# Altium PCB bootleg-2.PcbDoc (part 1 of 2)
Units mm, origin at the board's own origin, x right, y up, seen from the top; angles counter-clockwise.
Board outline 284.8 x 94.3 mm, 2 copper layers (Component Side, Bottom Layer), stack 1.571 mm thick; 153 components, 101 nets, 573 pads, 48 vias.
Unrouted connection lines stored in the file: 2.
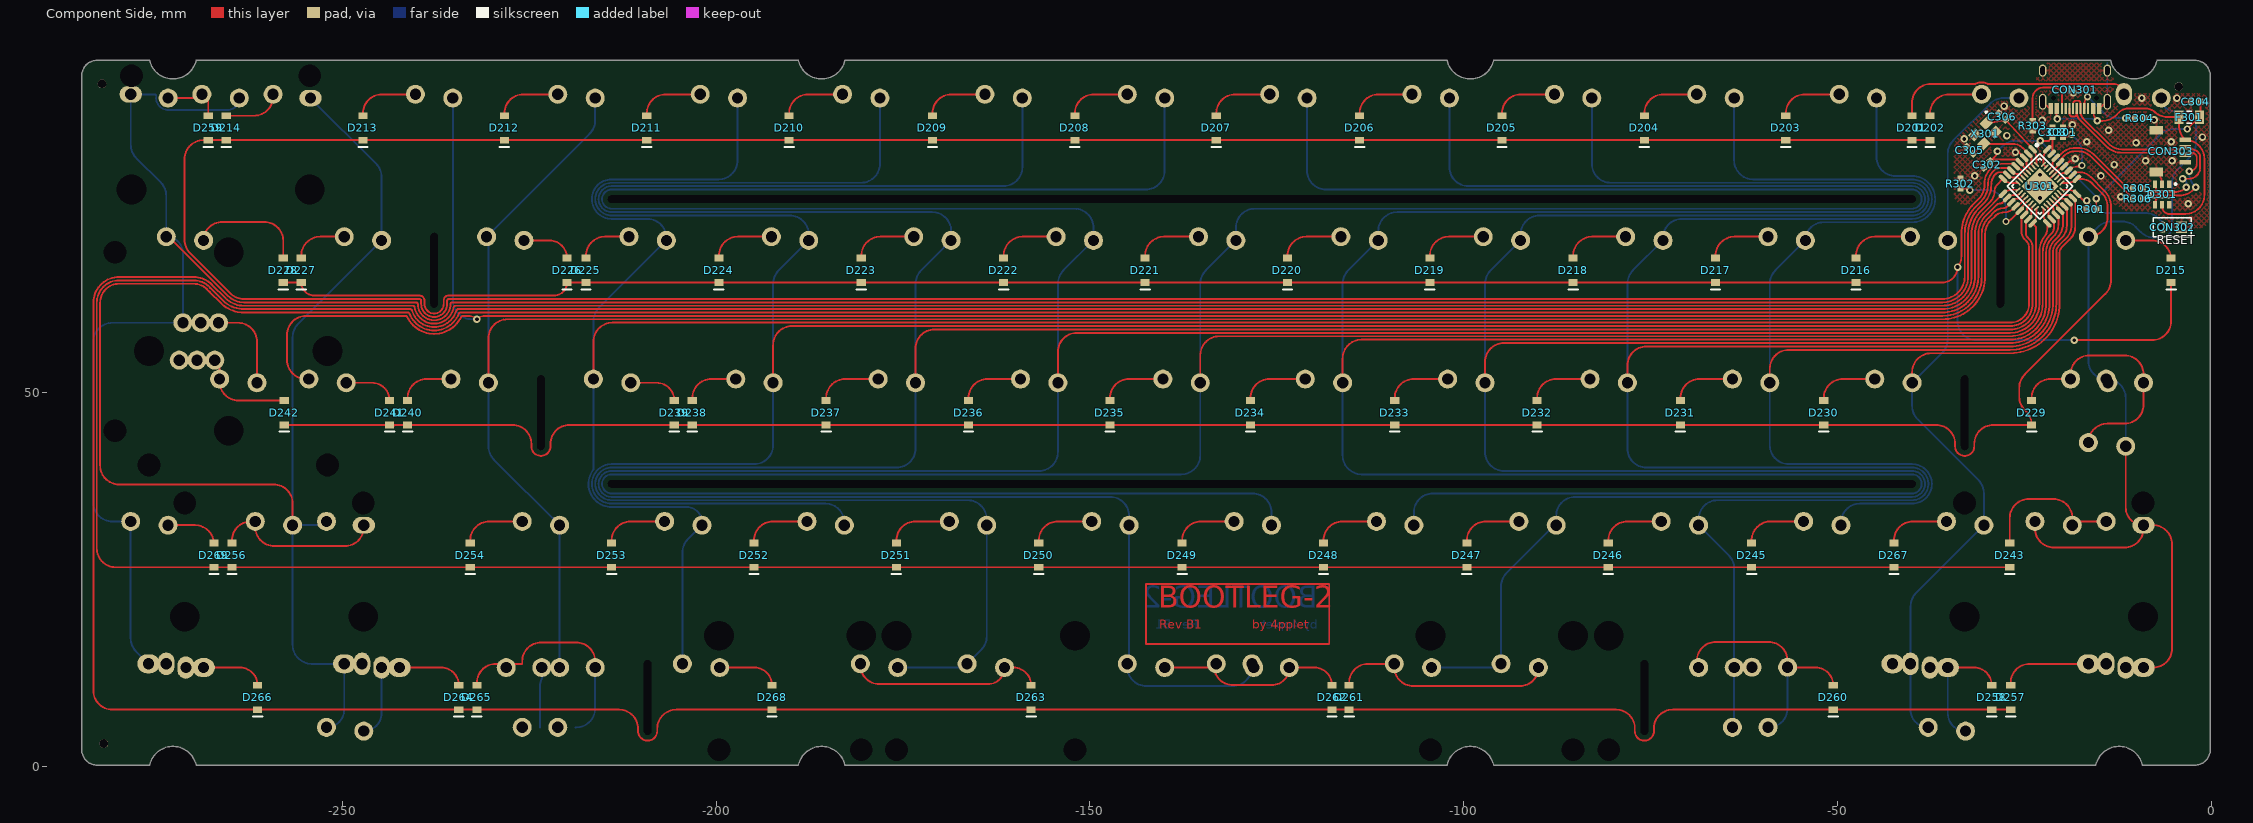
[diagram p0: Component Side view]
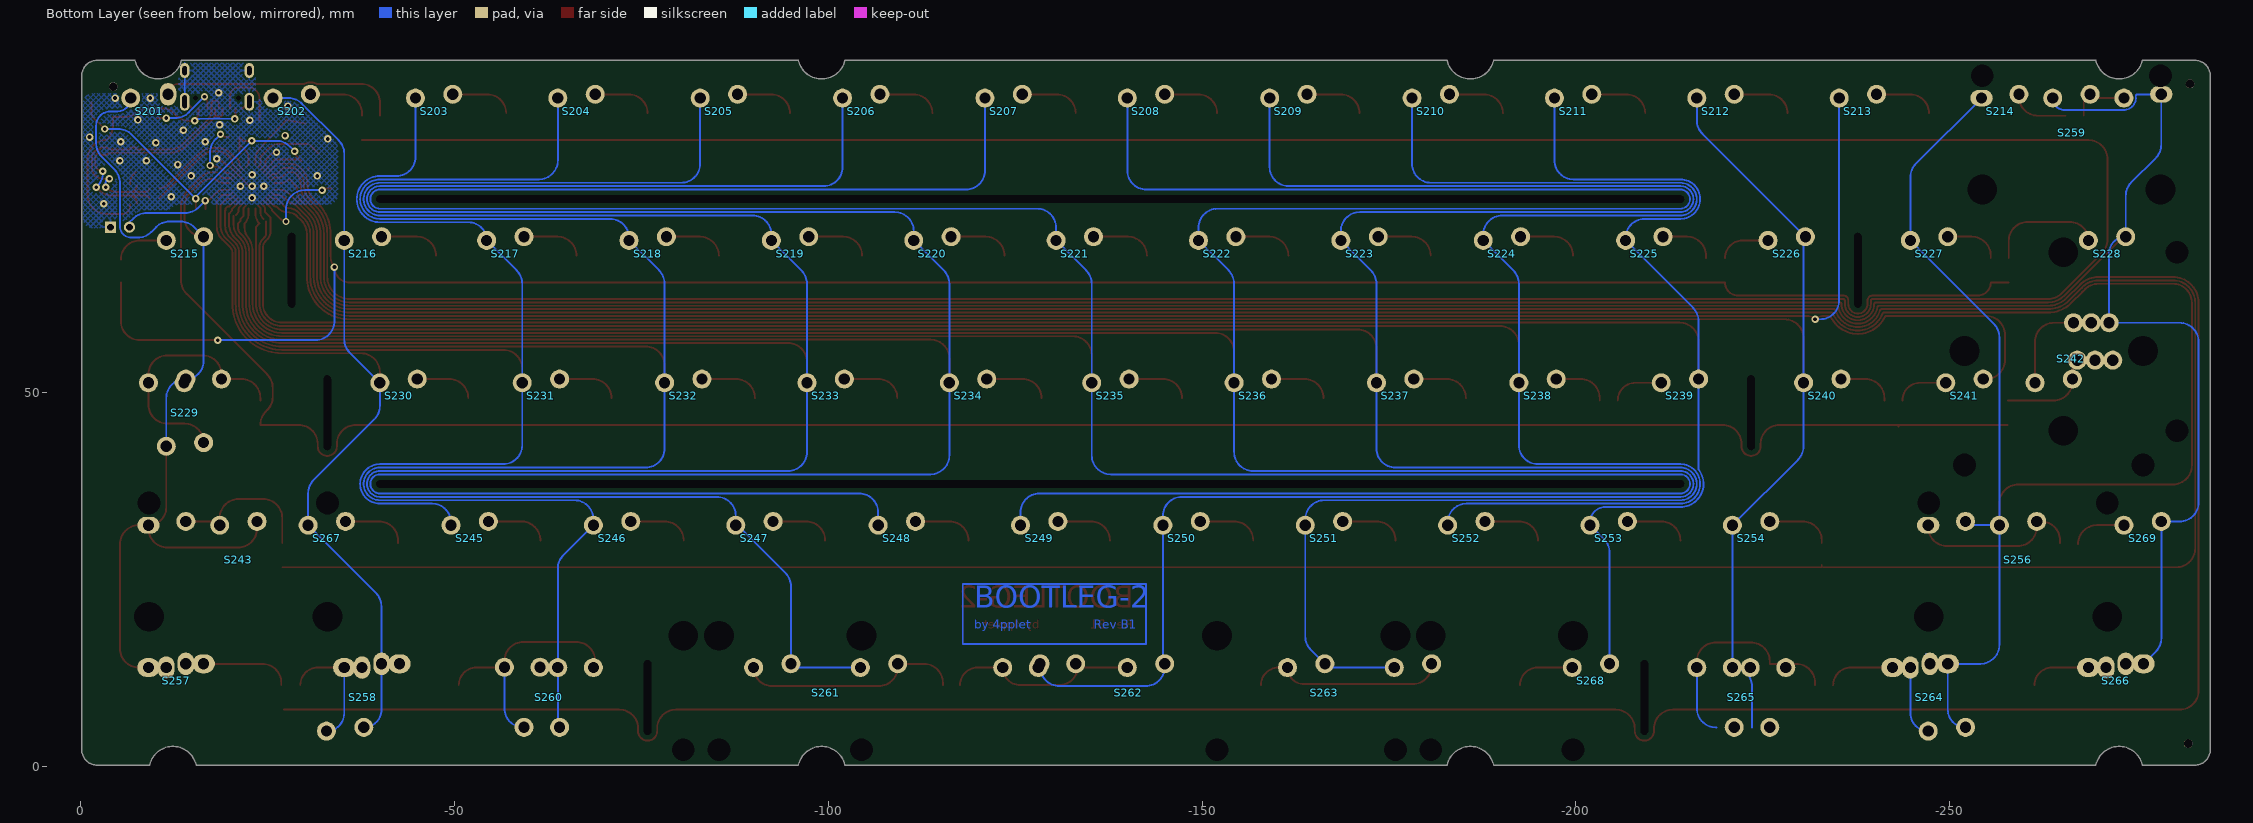
[diagram p1: Bottom Layer view, seen from below]

## Layer stack, top to bottom
Top Solder: solder mask 0.0102, Solder Resist, Dk 3.5
Component Side: signal copper 0.0356
Dielectric 1: core 1.5, FR-4, Dk 4.2
Bottom Layer: signal copper 0.0356
Solder Side: solder mask 0.0102, Solder Resist, Dk 3.5

## Board outline
-282.856,0.165 -275.856,0.165 ccw(c-275.856,0.215) -275.807,0.204 cw(c-272.706,-0.52) -269.605,0.204 ccw(c-269.556,0.215) -269.556,0.165 -189.056,0.165 ccw(c-189.056,0.215) -189.007,0.204 cw(c-185.906,-0.52) -182.805,0.204 cw(c-185.906,-0.52) -182.805,0.204 ccw(c-182.756,0.215) -182.756,0.165 -102.256,0.165 ccw(c-102.256,0.215) -102.207,0.204 cw(c-99.106,-0.52) -96.005,0.204 cw(c-99.106,-0.52) -96.005,0.204 ccw(c-95.956,0.215) -95.956,0.165 -15.456,0.165 ccw(c-15.456,0.215) -15.407,0.204 cw(c-12.306,-0.52) -9.205,0.204 ccw(c-9.156,0.215) -9.156,0.165 ccw(c-9.156,0.215) -9.156,0.165 -2.156,0.165 ccw(c-2.156,2.215) -0.106,2.215 -0.106,92.415 ccw(c-2.156,92.415) -2.156,94.465 -7.156,94.465 ccw(c-7.156,94.415) -7.17,94.464 ccw(c-7.183,94.415) -7.232,94.426 cw(c-10.333,95.149) -13.434,94.426 ccw(c-13.483,94.415) -13.483,94.465 -95.956,94.465 cw(c-95.956,94.415) -95.956,94.465 ccw(c-95.956,94.415) -96.005,94.426 cw(c-99.106,95.149) -102.207,94.426 cw(c-99.106,95.149) -102.207,94.426 ccw(c-102.256,94.415) -102.256,94.465 -182.756,94.465 ccw(c-182.756,94.415) -182.805,94.426 ccw(c-185.906,95.149) -182.805,94.426 cw(c-185.906,95.149) -189.007,94.426 ccw(c-189.056,94.415) -189.056,94.465 -269.556,94.465 ccw(c-269.556,94.415) -269.605,94.426 cw(c-272.706,95.149) -275.807,94.426 cw(c-272.706,95.149) -275.807,94.426 ccw(c-275.856,94.415) -275.856,94.465 -282.856,94.465 cw(c-282.856,94.415) -282.856,94.465 ccw(c-282.856,92.415) -284.906,92.415 ccw(c-284.856,92.415) -284.906,92.414 -284.906,36.565 -284.906,2.215 ccw(c-282.856,2.215)

## Design rules (kind name [scope] priority, off if disabled: settings)
Clearance [All] p1: gap=0.2 ignorepadtopadclearanceinfootprint=FALSE except(0: Arc-Hole Track-Hole SMDPad-Hole THPad-Hole Via-Hole Fill-Hole Poly-Hole Region-Hole Text-Hole; 0.254: THPad-THPad THPad-Via THPad-Fill THPad-Poly THPad-Region THPad-Text Via-Via Via-Fill Via-Poly Via-Region Via-Text Fill-Fill Fill-Poly Fill-Region Fill-Text Poly-Poly Poly-Region Poly-Text Region-Region Region-Text Text-Text)
ComponentClearance [InComponent('No Component') And OnLayer('Component Side')] p1: gap=0.254 collisioncheckmode=3 verticalgap=0.254 showdistances=FALSE
DiffPairsRouting DiffPairsRouting_USB [InDifferentialPairClass('All Differential Pairs')] p1: maxlimit=0.254 minlimit=0.203 mostfreqgap=0.203 toplayer_minwidth=0.152 toplayer_maxwidth=0.381 toplayer_prefwidth=0.152 bottomlayer_minwidth=0.152 bottomlayer_maxwidth=0.381 bottomlayer_prefwidth=0.152 maxuncoupledlength=12.7
DiffPairsRouting [All] p2: maxlimit=0.254 minlimit=0.254 mostfreqgap=0.254 toplayer_minwidth=0.381 toplayer_maxwidth=0.381 toplayer_prefwidth=0.381 bottomlayer_minwidth=0.381 bottomlayer_maxwidth=0.381 bottomlayer_prefwidth=0.381 maxuncoupledlength=12.7
HoleSize [All] p1: absolutevalues=TRUE maxlimit=20 minlimit=0.025 maxpercent=80.000 minpercent=20.000
MatchedLengths MatchedLengths_USB_DiffPairs_1 [All] p1: tolerance=0.127 checknetsindiffpair=TRUE checkdiffpairvsdiffpair=FALSE checkxsignals=FALSE checkothers=FALSE
MatchedLengths MatchedLengths_USB_DiffPairs [All] p2: tolerance=0.127 checknetsindiffpair=TRUE checkdiffpairvsdiffpair=FALSE checkxsignals=FALSE checkothers=FALSE
PolygonConnect PolygonConnect_1 [All vs IsVia] p1: connectstyle=Direct reliefconductorwidth=0.254 reliefentries=4 polygonreliefangle="90 Angle" airgapwidth=0.254
PolygonConnect [All] p2: connectstyle=Relief reliefconductorwidth=0.254 reliefentries=4 polygonreliefangle="90 Angle" airgapwidth=0.254
RoutingVias [All] p1: holewidth=0.711 width=1.27 viastyle="Through Hole" minholewidth=0.711 minwidth=1.27 maxholewidth=0.711 maxwidth=1.27
SolderMaskExpansion [All] p1: expansion=0.102 istentingtop=FALSE
Width [All] p1: maxlimit=0.254 minlimit=0.203 preferedwidth=0.254
27 further rules are at their usual default settings.

## Classes and differential pairs
component class Designator: C201 C202 C203 C204 C205 C206 D201 D202 D203 D204 D205 D206 D207 D208 D209 D210 D211 D212 D213 D214 D215 D216 D217 D218 D219 D220 D221 D222 D223 D224 D225 D226 D227 D228 D229 D230 D231 D232 D233 D234 D235 D236 D237 D238 D239 D240 D241 D242 D243 D245 D246 D247 D248 D249 D250 D251 D252 D253 D254 D256 D257 D258 D259 D260 D261 D262 D263 D264 D265 D266 D267 D268 D269 S201 S202 S203 S204 S205 S206 S207 S208 S209 S210 S211 S212 S213 S214 S215 S216 S217 S218 S219 S220 S221 S222 S223 S224 S225 S226 S227 S228 S229 S230 S231 S232 S233 S234 S235 S236 S237 S238 S239 S240 S241 S242 S243 S245 S246 S247 S248 S249 S250 S251 S252 S253 S254 S256 S257 S258 S259 S260 S261 S262 S263 S264 S265 S266 S267 S268 S269
differential pair D: +D_P -D_N
differential pair D_PRE: +D_PRE_P -D_PRE_N

## Components (designator, comment, footprint, x,y, rotation, side; value= is the part's Value field where it differs from the comment)
C301 "" C0603[1608] -19.818,84.836 r270 top value=1uF
C302 "" C0603[1608] -29.978,80.518 r45 top value=0.1uF
C303 "" C0603[1608] -21.215,84.836 r270 top value=0.1uF
C304 "" C0603[1608] -2.038,88.9 r0 top value=4,7uF
C305 "" C0603[1608] -32.264,82.423 r315 top value=15pF
C306 "" C0603[1608] -27.951,86.939 r315 top value=15pF
CON301 "TYPE-C-31-M-12" TYPE-C-31-M-12 -18.206,88 r180 top
CON302 "Header 2" HDR1X2 -3.943,72.136 r180 top
CON303 "Header 5" "JST SM04B-SRSS-TB" -7.31,85.104 r270 top
D201 "Diode" SOD-123 -40.016,85.415 r90 top
D202 "Diode" SOD-123 -37.598,85.415 r90 top
D203 "Diode" SOD-123 -56.902,85.415 r90 top
D204 "Diode" SOD-123 -75.825,85.415 r90 top
D205 "Diode" SOD-123 -94.875,85.415 r90 top
D206 "Diode" SOD-123 -113.925,85.415 r90 top
D207 "Diode" SOD-123 -133.102,85.415 r90 top
D208 "Diode" SOD-123 -152.025,85.415 r90 top
D209 "Diode" SOD-123 -171.075,85.415 r90 top
D210 "Diode" SOD-123 -190.252,85.415 r90 top
D211 "Diode" SOD-123 -209.302,85.415 r90 top
D212 "Diode" SOD-123 -228.352,85.415 r90 top
D213 "Diode" SOD-123 -247.275,85.415 r90 top
D214 "Diode" SOD-123 -265.563,85.415 r90 top
D215 "Diode" SOD-123 -5.34,66.365 r90 top
D216 "Diode" SOD-123 -47.504,66.365 r90 top
D217 "Diode" SOD-123 -66.3,66.365 r90 top
D218 "Diode" SOD-123 -85.35,66.365 r90 top
D219 "Diode" SOD-123 -104.527,66.365 r90 top
D220 "Diode" SOD-123 -123.577,66.365 r90 top
D221 "Diode" SOD-123 -142.627,66.365 r90 top
D222 "Diode" SOD-123 -161.55,66.365 r90 top
D223 "Diode" SOD-123 -180.6,66.365 r90 top
D224 "Diode" SOD-123 -199.65,66.365 r90 top
D225 "Diode" SOD-123 -217.435,66.365 r90 top
D226 "Diode" SOD-123 -219.975,66.365 r90 top
D227 "Diode" SOD-123 -255.535,66.365 r90 top
D228 "Diode" SOD-123 -257.943,66.365 r90 top
D229 "Diode" SOD-123 -24.009,47.315 r90 top
D230 "Diode" SOD-123 -51.822,47.315 r90 top
D231 "Diode" SOD-123 -70.999,47.315 r90 top
D232 "Diode" SOD-123 -90.176,47.315 r90 top
D233 "Diode" SOD-123 -109.226,47.315 r90 top
D234 "Diode" SOD-123 -128.53,47.315 r90 top
D235 "Diode" SOD-123 -147.326,47.315 r90 top
D236 "Diode" SOD-123 -166.249,47.315 r90 top
D237 "Diode" SOD-123 -185.299,47.315 r90 top
D238 "Diode" SOD-123 -203.211,47.315 r90 top
D239 "Diode" SOD-123 -205.624,47.315 r90 top
D240 "Diode" SOD-123 -241.3,47.315 r90 top
D241 "Diode" SOD-123 -243.713,47.315 r90 top
D242 "Diode" SOD-123 -257.81,47.315 r90 top
D243 "Diode" SOD-123 -26.935,28.265 r90 top
D245 "Diode" SOD-123 -61.474,28.265 r90 top
D246 "Diode" SOD-123 -80.651,28.265 r90 top
D247 "Diode" SOD-123 -99.574,28.265 r90 top
D248 "Diode" SOD-123 -118.751,28.265 r90 top
D249 "Diode" SOD-123 -137.674,28.265 r90 top
D250 "Diode" SOD-123 -156.851,28.265 r90 top
D251 "Diode" SOD-123 -175.901,28.265 r90 top
D252 "Diode" SOD-123 -194.951,28.265 r90 top
D253 "Diode" SOD-123 -214.001,28.265 r90 top
D254 "Diode" SOD-123 -232.924,28.265 r90 top
D256 "Diode" SOD-123 -264.806,28.265 r90 top
D257 "Diode" SOD-123 -26.808,9.215 r90 top
D258 "Diode" SOD-123 -29.348,9.215 r90 top
D259 "Diode" SOD-123 -267.981,85.415 r90 top
D260 "Diode" SOD-123 -50.552,9.215 r90 top
D261 "Diode" SOD-123 -115.327,9.215 r90 top
D262 "Diode" SOD-123 -117.613,9.215 r90 top
D263 "Diode" SOD-123 -157.872,9.215 r90 top
D264 "Diode" SOD-123 -234.453,9.215 r90 top
D265 "Diode" SOD-123 -232.035,9.215 r90 top
D266 "Diode" SOD-123 -261.372,9.215 r90 top
D267 "Diode" SOD-123 -42.429,28.265 r90 top
D268 "Diode" SOD-123 -192.543,9.215 r90 top
D269 "Diode" SOD-123 -267.214,28.265 r90 top
D301 "SRV05" SOT-23-6 -6.544,76.524 r270 top
F301 "Fuse Thermal" C1206[3216] -2.927,86.868 r180 top
R301 "Res1" R0603[1608] -16.008,74.549 r180 top value=10K
R302 "Res1" R0603[1608] -33.534,77.978 r90 top value=10K
R303 "Res1" R0603[1608] -23.876,85.725 r270 top value=5k1
R304 "Res1" R0603[1608] -9.525,86.741 r0 top value=5k1
R305 "Res1" R0603[1608] -9.785,77.343 r0 top value=22
R306 "Res1" R0603[1608] -9.785,75.946 r0 top value=22
S201 "MX" "Alps-switch - switched pol"#1 -9.156,85.415 r180 bottom locked
S202 "MX" "Alps-switch - switched pol"#2 -28.206,85.415 r180 bottom locked
S203 "MX" "Alps-switch - switched pol"#2 -47.256,85.415 r180 bottom locked
S204 "MX" "Alps-switch - switched pol"#2 -66.306,85.415 r180 bottom locked
S205 "MX" "Alps-switch - switched pol"#2 -85.356,85.415 r180 bottom locked
S206 "MX" "Alps-switch - switched pol"#2 -104.406,85.415 r180 bottom locked
S207 "MX" "Alps-switch - switched pol"#2 -123.456,85.415 r180 bottom locked
S208 "MX" "Alps-switch - switched pol"#2 -142.506,85.415 r180 bottom locked
S209 "MX" "Alps-switch - switched pol"#2 -161.556,85.415 r180 bottom locked
S210 "MX" "Alps-switch - switched pol"#2 -180.606,85.415 r180 bottom locked
S211 "MX" "Alps-switch - switched pol"#2 -199.656,85.415 r180 bottom locked
S212 "MX" "Alps-switch - switched pol"#2 -218.706,85.415 r180 bottom locked
S213 "MX" "Alps-switch - switched pol"#2 -237.756,85.415 r180 bottom locked
S214 "MX" "Alps-switch - switched pol"#3 -256.806,85.415 r180 bottom locked
S215 "MX" "ALPS-switch - 1.5U" -13.918,66.365 r180 bottom locked
S216 "MX" "Alps-switch - switched pol"#2 -37.731,66.365 r180 bottom locked
S217 "MX" "Alps-switch - switched pol"#2 -56.781,66.365 r180 bottom locked
S218 "MX" "Alps-switch - switched pol"#2 -75.831,66.365 r180 bottom locked
S219 "MX" "Alps-switch - switched pol"#2 -94.881,66.365 r180 bottom locked
S220 "MX" "Alps-switch - switched pol"#2 -113.931,66.365 r180 bottom locked
S221 "MX" "Alps-switch - switched pol"#2 -132.981,66.365 r180 bottom locked
S222 "MX" "Alps-switch - switched pol"#2 -152.031,66.365 r180 bottom locked
S223 "MX" "Alps-switch - switched pol"#2 -171.081,66.365 r180 bottom locked
S224 "MX" "Alps-switch - switched pol"#2 -190.131,66.365 r180 bottom locked
S225 "MX" "Alps-switch - switched pol"#2 -209.181,66.365 r180 bottom
S226 "MX" Alps-switch -228.231,66.365 r180 bottom locked
S227 "MX" "Alps-switch - switched pol"#2 -247.281,66.365 r180 bottom locked
S228 "MX" "ALPS-switch - 1.5U" -271.093,66.365 r180 bottom
S229 "MX" "ALPS-switch - CAPS" -16.3,47.315 r180 bottom
S230 "MX" "Alps-switch - switched pol"#2 -42.493,47.315 r180 bottom locked
S231 "MX" "Alps-switch - switched pol"#2 -61.543,47.315 r180 bottom locked
S232 "MX" "Alps-switch - switched pol"#2 -80.593,47.315 r180 bottom locked
S233 "MX" "Alps-switch - switched pol"#2 -99.643,47.315 r180 bottom locked
S234 "MX" "Alps-switch - switched pol"#2 -118.693,47.315 r180 bottom locked
S235 "MX" "Alps-switch - switched pol"#2 -137.743,47.315 r180 bottom locked
S236 "MX" "Alps-switch - switched pol"#2 -156.793,47.315 r180 bottom locked
S237 "MX" "Alps-switch - switched pol"#2 -175.843,47.315 r180 bottom locked
S238 "MX" "Alps-switch - switched pol"#2 -194.893,47.315 r180 bottom locked
S239 "MX" Alps-switch -213.943,47.315 r180 bottom locked
S240 "MX" "Alps-switch - switched pol"#2 -232.993,47.315 r180 bottom locked
S241 "MX" Alps-switch -252.018,47.315 r180 bottom locked
S242 "MX" "ALPS-switch - Enter" -263.956,47.315 r180 bottom locked
S243 "MX" "ALPS-switch - Left shift v2" -21.062,28.265 r180 bottom locked
S245 "MX" "Alps-switch - switched pol"#2 -52.018,28.265 r180 bottom locked
S246 "MX" "Alps-switch - switched pol"#2 -71.068,28.265 r180 bottom locked
S247 "MX" "Alps-switch - switched pol"#2 -90.118,28.265 r180 bottom locked
S248 "MX" "Alps-switch - switched pol"#2 -109.168,28.265 r180 bottom locked
S249 "MX" "Alps-switch - switched pol"#2 -128.218,28.265 r180 bottom locked
S250 "MX" "Alps-switch - switched pol"#2 -147.268,28.265 r180 bottom locked
S251 "MX" "Alps-switch - switched pol"#2 -166.318,28.265 r180 bottom locked
S252 "MX" "Alps-switch - switched pol"#2 -185.368,28.265 r180 bottom locked
S253 "MX" "Alps-switch - switched pol"#2 -204.418,28.265 r180 bottom locked
S254 "MX" "Alps-switch - switched pol"#2 -223.468,28.265 r180 bottom locked
S256 "MX" "ALPS-switch - right shift - stabs" -249.66,28.265 r180 bottom locked
S257 "MX" "ALPS-switch - 1.5u MOD-L" -13.918,9.215 r180 bottom locked
S258 "MX" "ALPS-switch - L_WIN - V2" -37.73,9.215 r180 bottom
S259 "MX" "ALPS-switch - backspace" -266.325,85.415 r180 bottom locked
S260 "MX" "ALPS-SWITCH - L_ALT - V2" -61.543,9.215 r180 bottom
S261 "MX" "ALPS-SWITCH - L SPLIT SPACE_V2" -102.024,9.215 r0 bottom locked
S262 "MX" "ALPS-SWITCH - SPACE_V3" -142.505,9.215 r180 bottom locked
S263 "MX" "ALPS-SWITCH - R SPLIT SPACE_V2" -163.937,9.215 r0 bottom locked
S264 "MX" "ALPS-switch - R_WIN V2" -247.28,9.215 r180 bottom
S265 "MX" "ALPS-SWITCH - R_ALT - V2" -223.468,9.215 r180 bottom
S266 "MX" "ALPS-switch - 1.5u MOD-R" -271.093,9.215 r180 bottom locked
S267 "MX" "Alps-switch - switched pol"#2 -32.899,28.265 r180 bottom
S268 "MX" "Alps-switch - switched pol"#2 -202.037,9.215 r180 bottom
S269 "MX" Alps-switch -275.856,28.265 r180 bottom locked
U301 "ATMEGA32U2" ATMEGA32U2-COMBO -22.892,77.6 r315 top
X301 "XTAL" XTAL-3225 -30.237,84.653 r225 top

## Footprints (in the part's own frame and the unit in brackets; to place one, negate y for a bottom-side part, rotate by r counter-clockwise, add the part's x,y. Pads: shape width x height; smd on the part's side, far side on the other; paste and mask are expansions set on the pad)
Alps-switch [mm]
  round 2.54 hole 1.499 mask+0.102: 1(-2.5,4) 2(2.5,4.5)
  round 1 on Mech14: ""(0,0)
"ALPS-switch - 1.5U" [mm]
  round 2.54 hole 1.499 mask+0.102: 1(-2.5,4) 2(2.5,4.5)
  round 1 on Mech14: ""(0,0)
"ALPS-switch - 1.5u MOD-L" [mm]
  oval 3x2.54 hole 1.499 mask+0.102: 1(-4.881,4) 2(2.5,4.5)
  oval 2.2x3 hole 1.499 mask+0.102: 1(-2.5,4) 2(0.119,4.5)
  round 1 on Mech14: ""(-2.381,0) ""(0,0)
"ALPS-switch - 1.5u MOD-R" [mm]
  oval 3x2.54 hole 1.499 mask+0.102: 1(-2.5,4) 2(4.881,4.5)
  oval 2.2x3 hole 1.499 mask+0.102: 1(-0.119,4) 2(2.5,4.5)
  round 1 on Mech14: ""(0,0) ""(2.381,0)
"ALPS-switch - backspace" [mil]
  round 100 hole 59 mask+4: 1(98.43,177.17) 1(276.57,157.48) 2(-98.43,157.48)
  oval 118.11x86.61 hole 59 mask+4: 2(473.43,177.17)
  round 60 hole 157.01 unplated: ""(-470,-325) ""(470,-325)
  round 60 hole 120 unplated: ""(-470,275) ""(470,275)
  round 39.37 on Mech14: ""(0,0) ""(375,0)
"ALPS-switch - CAPS" [mm]
  round 2.54 hole 1.499 mask+0.102: 1(-7.263,4) 1(0.119,-4) 1(2.5,4.5) 2(-4.881,-4.5) 2(-2.5,4) 2(-2.262,4.5)
  round 1 on Mech14: ""(-4.763,0) ""(-2.381,0) ""(0,0)
"ALPS-switch - Enter" [mil]
  round 100 hole 59 mask+4: 1(-98.43,157.48) 1(104.28,473.62) 1(198.03,473.62) 1(291.78,473.62) 2(98.43,177.17) 2(123.97,276.77) 2(217.72,276.77) 2(311.47,276.77)
  round 60 hole 120 unplated: ""(-470,-275) ""(470,-275) ""(650.2,-94.8) ""(650.2,845.2)
  round 60 hole 157.01 unplated: ""(-470,325) ""(50.2,-94.8) ""(50.2,845.2) ""(470,325)
  round 39.37 on Mech14: ""(0,0) ""(281.45,375.2) ""(375.2,375.2) ""(468.95,375.2)
"ALPS-SWITCH - L SPLIT SPACE_V2" [mil]
  round 100 hole 59 mask+4.02: 1(-285.93,-177.17) 1(473.43,-157.48) 2(-89.07,-157.48) 2(276.57,-177.17)
  round 39.37 on Mech14: ""(-187.5,0) ""(375,0)
  round 60 hole 157.01 unplated: ""(-95,-325)
  round 60 hole 120 unplated: ""(-95,275)
"ALPS-SWITCH - L_ALT - V2" [mm]
  round 2.54 hole 1.499 mask+0.102: 1(-4.881,4.048) 1(-2.262,-4) 1(7.025,4) 2(-0.119,4.048) 2(2.262,4) 2(2.5,-4)
  round 1 on Mech14: ""(-2.381,0.048) ""(0,0) ""(4.763,0)
"ALPS-switch - L_WIN - V2" [mm]
  round 2.54 hole 1.499 mask+0.102: 1(-4.881,-4.5) 2(0.119,-4)
  oval 3x2.54 hole 1.499 mask+0.102: 1(-2.5,4) 2(4.881,4.5)
  oval 2.2x3 hole 1.499 mask+0.102: 1(-0.119,4) 2(2.5,4.5)
  round 1 on Mech14: ""(-2.381,0) ""(0,0) ""(2.381,0)
"ALPS-switch - Left shift v2" [mil]
  oval 118.11x86.61 hole 59 mask+4.02: 1(-473.43,157.48)
  round 100 hole 59 mask+4.02: 1(98.43,177.17) 2(-276.57,177.17) 2(-98.43,157.48)
  round 60 hole 157.01 unplated: ""(-470,-325) ""(470,-325)
  round 60 hole 120 unplated: ""(-470,275) ""(470,275)
  round 39.37 on Mech14: ""(-375,0) ""(0,0)
"ALPS-SWITCH - R SPLIT SPACE_V2" [mil]
  round 100 hole 59 mask+4.02: 1(-660.93,-177.17) 1(98.43,-157.48) 2(-464.07,-157.48) 2(-98.43,-177.17)
  round 39.37 on Mech14: ""(-562.5,0) ""(0,0)
  round 60 hole 157.01 unplated: ""(-470,-325) ""(470,-325)
  round 60 hole 120 unplated: ""(-470,275) ""(470,275)
"ALPS-SWITCH - R_ALT - V2" [mm]
  round 2.54 hole 1.499 mask+0.102: 1(-7.263,4) 1(-2.262,-4) 1(4.644,4) 2(-2.5,4) 2(-0.119,4) 2(2.5,-4)
  round 1 on Mech14: ""(-4.763,0) ""(0,0) ""(2.381,0)
"ALPS-switch - R_WIN V2" [mm]
  oval 3x2.54 hole 1.499 mask+0.102: 1(-4.881,4) 2(2.5,4.5)
  oval 2.2x3 hole 1.499 mask+0.102: 1(-2.5,4) 2(0.119,4.5)
  round 2.54 hole 1.499 mask+0.102: 1(-0.119,-4.5) 2(4.881,-4)
  round 1 on Mech14: ""(-2.381,0) ""(0,0) ""(2.381,0)
"ALPS-switch - right shift - stabs" [mil]
  round 100 hole 59 mask+4: 1(98.43,177.17) 1(276.57,157.48) 2(473.43,177.17)
  oval 118.11x86.61 hole 59 mask+4: 2(-98.43,157.48)
  round 60 hole 157.01 unplated: ""(-95,-325) ""(845,-325)
  round 60 hole 120 unplated: ""(-95,275) ""(845,275)
  round 39.37 on Mech14: ""(0,0) ""(375,0)
"ALPS-SWITCH - SPACE_V3" [mil]
  round 100 hole 59 mask+4: 1(-754.97,157.48) 1(-370.32,177.17) 1(-98.43,157.48) 2(-567.18,157.48) 2(-558.12,177.17) 2(98.43,177.17)
  round 60 hole 120 unplated: ""(-2437.4,-275) ""(-2250,-275) ""(1499.61,-275) ""(2250,-275)
  round 60 hole 157.01 unplated: ""(-2437.4,325) ""(-2250,325) ""(1499.61,325) ""(2250,325)
  round 39.37 on Mech14: ""(-656.55,0) ""(-468.75,0) ""(0,0)
"Alps-switch - switched pol"#1 [mm]
  oval 2.2x3 hole 1.499 mask+0.102: 1(2.5,4.5)
  round 2.54 hole 1.499 mask+0.102: 2(-2.5,4)
  round 1 on Mech14: ""(0,0)
"Alps-switch - switched pol"#2 [mm]
  round 2.54 hole 1.499 mask+0.102: 1(2.5,4.5) 2(-2.5,4)
  round 1 on Mech14: ""(0,0)
"Alps-switch - switched pol"#3 [mm]
  round 2.54 hole 1.499 mask+0.102: 1(2.5,4.5)
  oval 3x2.2 hole 1.499 mask+0.102: 2(-2.5,4)
  round 1 on Mech14: ""(0,0)
ATMEGA32U2-COMBO [mm]
  oval 1.4x0.55 smd: 1(-4.2,2.8) 2(-4.2,2) 3(-4.2,1.2) 4(-4.2,0.4) 5(-4.2,-0.4) 6(-4.2,-1.2) 7(-4.2,-2) 8(-4.2,-2.8) 17(4.2,-2.8) 18(4.2,-2) 19(4.2,-1.2) 20(4.2,-0.4) 21(4.2,0.4) 22(4.2,1.2) 23(4.2,2) 24(4.2,2.8)
  oval 0.85x0.25 smd: 1(-2.4,1.75) 2(-2.4,1.25) 3(-2.4,0.75) 4(-2.4,0.25) 5(-2.4,-0.25) 6(-2.4,-0.75) 7(-2.4,-1.25) 8(-2.4,-1.75) 17(2.4,-1.75) 18(2.4,-1.25) 19(2.4,-0.75) 20(2.4,-0.25) 21(2.4,0.25) 22(2.4,0.75) 23(2.4,1.25) 24(2.4,1.75)
  oval 0.55x1.4 smd: 9(-2.8,-4.2) 10(-2,-4.2) 11(-1.2,-4.2) 12(-0.4,-4.2) 13(0.4,-4.2) 14(1.2,-4.2) 15(2,-4.2) 16(2.8,-4.2) 25(2.8,4.2) 26(2,4.2) 27(1.2,4.2) 28(0.4,4.2) 29(-0.4,4.2) 30(-1.2,4.2) 31(-2,4.2) 32(-2.8,4.2)
  oval 0.25x0.85 smd: 9(-1.75,-2.4) 10(-1.25,-2.4) 11(-0.75,-2.4) 12(-0.25,-2.4) 13(0.25,-2.4) 14(0.75,-2.4) 15(1.25,-2.4) 16(1.75,-2.4) 25(1.75,2.4) 26(1.25,2.4) 27(0.75,2.4) 28(0.25,2.4) 29(-0.25,2.4) 30(-0.75,2.4) 31(-1.25,2.4) 32(-1.75,2.4)
  rect 3.5x3.5 smd: 28(0,0)
  silkscreen extent -4.32,-3.1 3.1,3.75, body extent -2.51,-2.51 2.51,2.51, height 1
C0603[1608] [mm] "Chip Resistor, 2-Leads, Body 1,57x0,80mm, IPC Medium Density"
  rect 0.8x0.85 smd: 1(-0.65,0) 2(0.65,0)
  body extent -0.83,-0.43 0.82,0.43, height 0.5
C1206[3216] [mm] "Chip Resistor, 2-Leads, Body 1,57x0,80mm, IPC Medium Density"
  rect 1.2x1.8 smd: 1(-1.35,0) 2(1.35,0)
  silkscreen extent -0.35,-0.8 0.35,0.8, body extent -1.6,-0.9 1.6,0.9, height 1.2
HDR1X2 [mm] "Connector; Header; 2 Position"
  rect 1.5x1.5 hole 0.9 mask+0.102: 1(0,0)
  round 1.5 hole 0.9 mask+0.102: 2(2.54,0)
  silkscreen extent -1.27,-1.27 3.81,1.27
"JST SM04B-SRSS-TB" [mm]
  rect 0.6x1.55 smd: 1(1.3,3.875) 2(2.3,3.875) 3(3.3,3.875) 4(4.3,3.875)
  rect 1.2x1.8 smd: 5(0,0) 5(5.6,0)
  body extent -0.21,-0.76 5.79,4.19, height 3.25
R0603[1608] [mm] "Chip Resistor, 2-Leads, Body 1,57x0,80mm, IPC Medium Density"
  rect 0.8x0.85 smd: 1(-0.65,0) 2(0.65,0)
  body extent -0.83,-0.43 0.82,0.43, height 0.5
SOD-123 [mm]
  rect 0.91x1.22 smd: 1(1.635,0) 2(-1.635,0)
  silkscreen extent -2.54,-0.64 -2.54,0.63, body extent -1.87,-0.85 1.88,0.85, height 1.2
SOT-23-6 [mm]
  rect 1x0.55 smd: 1(-1.375,0.95) 2(-1.375,0) 3(-1.375,-0.95) 4(1.375,-0.95) 5(1.375,0) 6(1.375,0.95)
  silkscreen extent -1.5,-1.55 0.46,1.93, body extent -1.37,-1.44 1.47,1.49, height 1.05
TYPE-C-31-M-12 [mm]
  rect 0.6x1.45 smd: A1B12(-3.25,0) A4B9(-2.45,0) B1A12(3.25,0) B4A9(2.45,0)
  rect 0.3x1.45 smd: A5(-1.25,0) A6(-0.25,0) A7(0.25,0) A8(1.25,0) B5(1.75,0) B6(0.75,0) B7(-0.75,0) B8(-1.75,0)
  oval 1x2.1 / inner oval 1x2.1 / far side oval 1.3x2.4 hole 0.6 slot 1.7 at 90 deg: S1(-4.32,-0.915) S1(4.32,-0.915)
  oval 1x1.6 / inner oval 1x1.6 / far side oval 1.3x2 hole 0.6 slot 1.2 at 90 deg: S1(-4.32,-5.095) S1(4.32,-5.095)
  round 0 hole 0.65 unplated: ""(-2.89,-1.445) ""(2.89,-1.445)
  body extent -4.47,-7.72 4.47,0.18, height 3.21
XTAL-3225 [mm]
  rect 1.4x1.2 smd: 1(-1.1,-0.85) 2(1.1,-0.85) 3(1.1,0.85) 4(-1.1,0.85)
  silkscreen extent -2.28,-2.03 -2.03,-1.78, body extent -1.6,-1.25 1.6,1.25, height 0.65

## Part data
C301: library part Cap, "Capacitor", LCSC MFG="Samsung Electro-Mechanics", LCSC Part #=C15849, MFG=KEMET, MFGPN=C0603C104M5RACTU, MRF.Part=CL10A105KB8NNNC, Version="0603 imperial"
C302 C303: library part Cap, "Capacitor", LCSC MFG=YAGEO, LCSC Part #=C14663, MFG=KEMET, MFGPN=C0603C104M5RACTU, MRF.Part=CC0603KRX7R9BB104, Version="0603 imperial"
C304: library part Cap, "Capacitor", LCSC MFG="Samsung Electro-Mechanics", LCSC Part #=C19666, MRF.Part=CL10A475KO8NNNC
C305 C306: library part Cap, "Capacitor", LCSC MFG="Samsung Electro-Mechanics", LCSC Part #=C1644, MRF.Part=CL10C150JB8NNNC, Version="0603 imperial"
CON301: LCSC MFG="Korean Hroparts Elec", LCSC Part #=C165948, MFG="Korean Hroparts Elec", MFGPN=TYPE-C-31-M-12, MRF.Part=TYPE-C-31-M-12
CON302: "Header, 2-Pin"
CON303: "JST for USB daughter board", LCSC MFG="JST Sales America", LCSC Part #=C160404, MFG="JST Sales America Inc.", MFGPN=SM04B-SRSS-TB(LF)(SN), MRF.Part=SM04B-SRSS-TB(LF)(SN)
D201 D202 D203 D204 D205 D206 D207 D208 D209 D210 D211 D212 D213 D214 D215 D216 D217 D218 D219 D220 D221 D222 D223 D224 D225 D226 D227 D228 D229 D230 D231 D232 D233 D234 D235 D236 D237 D238 D239 D240 D241 D242 D243 D245 D246 D247 D248 D249 D250 D251 D252 D253 D254 D256 D257 D258 D259 D260 D261 D262 D263 D264 D265 D266 D267 D268 D269: "Default Diode", LCSC MFG="Brightking Elec (TAIWAN)", LCSC Part #=C109002, MFG="Bourns Inc.", MFGPN=CD0603-B0340R, MRF.Part=CD4148WTP, Version="0603 imperial"
D301: LCSC MFG="ProTek Devices", LCSC Part #=C85364, MRF.Part=SRV05-4-P-T7
F301: "Thermal Fuse", LCSC MFG="Shenzhen JDT Fuse", LCSC Part #=C135338, MFG="Bel Fuse Inc.", MFGPN=0ZCJ0050FF2G, MRF.Part=ASMD1206-050
R301 R302: "Resistor", LCSC MFG="Uniroyal Elec", LCSC Part #=C25804, MFG="Panasonic Electronic Components", MFGPN=ERJ-3EKF5101V, MRF.Part=0603WAF1002T5E, Version="0603 imperial"
R303 R304: "Resistor", LCSC MFG="Uniroyal Elec", LCSC Part #=C23186, MFG="Panasonic Electronic Components", MFGPN=ERJ-3EKF5101V, MRF.Part=0603WAF5101T5E, Version="0603 imperial"
R305 R306: "Resistor", LCSC MFG="Uniroyal Elec", LCSC Part #=C23345, MFG="Panasonic Electronic Components", MFGPN=ERJ-3EKF5101V, MRF.Part=0603WAF220JT5E, Version="0603 imperial"
S201 S202 S203 S204 S205 S206 S207 S208 S209 S210 S211 S212 S213 S214 S216 S217 S218 S219 S220 S221 S222 S223 S224 S225 S226 S227 S228 S229 S230 S231 S232 S233 S234 S235 S236 S237 S238 S239 S240 S241 S242 S243 S245 S246 S247 S248 S249 S250 S251 S252 S253 S254 S256 S257 S258 S259 S260 S261 S262 S263 S264 S265 S266 S267 S268 S269: library part SW-PB, "Switch"
S215: library part SW-PB, "TAB"
U301: LCSC MFG="Microchip Tech", LCSC Part #=C57345, MFG="Microchip Technology", MFGPN=ATMEGA32U2-AUR, MRF.Part=ATMEGA32U2-MU
X301: "Crystal Oscillator", LCSC MFG="Yangxing Tech", LCSC Part #=C13738, MRF.Part=X322516MLB4SI

## Free pads (board coordinates)
  round 1.152 hole 1.152 unplated paste+0.148 mask+0.148: ""(-282.2,91.313) ""(-281.946,3.048) ""(-4.324,90.932)
  round 0 hole 1 slot 10 at 90 deg unplated: ""(-237.75,66.365) ""(-223.462,47.315) ""(-209.185,9.215) ""(-75.825,9.215) ""(-32.962,47.315) ""(-28.2,66.365)
  round 0 hole 1 slot 175 at 0 deg unplated: ""(-127.006,37.79) ""(-127.006,75.89)

## Via types
v1: diameter 1, hole 0.5, Component Side to Bottom Layer, tented both sides, 43 vias
v2: diameter 1, hole 0.5, Component Side to Bottom Layer, tented bottom, 5 vias

## Nets (pads, with @x,y where several pads share a name; then routed paths per layer and width w, separated by ;. In a path a pad name is that pad's centre, name@x,y a point inside that pad or via, vN(x,y) a via of type N, cw(c..) or ccw(c..) an arc to the next point about the centre after c; other vN are vias at no path point)
col1: S201.2 S215.2 S229.2 S243.1 S257.1 U301.25 | length 137.8
  Component Side w0.254: S243.1@-23.562,32.765 -23.562,31.821 ccw(c-21.022,31.821) -21.022,29.281 -11.577,29.281 ccw(c-11.577,31.821) -9.037,31.821 S243.1@-9.037,32.265 ; U301.25@-19.958,78.06 -19.223,78.06 ccw(c-19.223,79.871) U301.25@-17.942,78.59 -17.359,78.59 cw(c-17.359,76.5) -15.882,77.979 cw(c-17.359,76.5) -15.881,77.978 -14.593,76.69 cw(c-16.389,74.894) -13.849,74.894 -13.849,73.405 cw(c-16.389,73.405) -16.389,70.865 S215.2@-16.418,70.865 ; S257.1@-11.418,12.405 S257.1@-11.418,13.215 -7.758,13.215 ccw(c-7.758,15.755) -5.218,15.755 -5.218,29.725 ccw(c-7.758,29.725) -7.758,32.265 S243.1@-9.037,32.265 ; S229.2@-11.418,42.815 -11.418,34.646 ccw(c-9.037,34.646) S243.1@-9.037,32.265
  Bottom Layer w0.254: S229.2@-11.418,42.815 -11.418,49.275 ccw(c-13.958,49.275) -13.958,51.815 S229.2@-14.037,51.815 cw(c-14.037,54.196) -16.418,54.196 S215.2@-16.418,70.865 -15.129,72.154 cw(c-13.333,70.358) -13.333,72.898 -11.853,72.898 cw(c-11.853,70.358) -10.057,72.154 -9.386,71.483 ccw(c-7.59,73.279) -8.984,71.156 ccw(c-7.59,73.279) -7.59,70.739 -6.737,70.739 ccw(c-6.737,72.263) -5.213,72.263 -5.213,78.069 cw(c-2.673,78.069) -4.469,79.865 -2.782,81.552 ccw(c-4.578,83.348) -2.038,83.348 -2.038,85.731 ccw(c-3.937,85.731) -3.937,87.63 -4.871,87.63 cw(c-4.871,89.415) S201.2@-6.656,89.415
col2: S202.2 S216.2 S230.2 S258.2 S267.2 U301.23 | length 144
  Component Side w0.254: S230.2@-39.993,51.315 -39.993,52.734 cw(c-37.453,52.734) -37.453,55.274 -26.879,55.274 ccw(c-26.879,61.9) -26.83,55.274 ccw(c-26.879,61.9) -20.253,61.851 ccw(c-26.879,61.9) -20.253,61.9 -20.253,68.762 cw(c-19.307,68.762) -19.976,69.431 -18.771,70.636 ; U301.23@-20.311,76.787 -19.978,76.454 -18.917,76.454 U301.23@-18.508,76.045 ; -18.915,70.479 ccw(c-20.711,72.275) -18.771,70.636 ; U301.23@-18.171,75.765 -18.171,72.275 cw(c-20.711,72.275) -18.771,70.636
  Bottom Layer w0.254: S258.2@-37.849,5.215 cw(c-37.849,7.596) -40.23,7.596 S258.2@-40.23,13.715 cw(c-38.253,13.715) -40.195,14.085 -40.195,21.417 cw(c-37.655,21.417) -39.451,23.213 S267.2@-30.399,32.265 -30.399,36.519 ccw(c-32.939,36.519) -31.143,38.315 -39.25,46.421 cw(c-37.453,48.217) -39.993,48.217 S230.2@-39.993,51.315 -35.975,55.334 ccw(c-37.771,57.13) -35.231,57.13 S216.2@-35.231,70.365 -35.231,81.96 cw(c-32.691,81.96) -34.487,83.756 -29.572,88.671 cw(c-27.776,86.875) -27.776,89.415 S202.2@-25.706,89.415
col3: S203.2 S217.2 S231.2 S245.2 U301.22 | length 170.4
  Component Side w0.254: S231.2@-59.043,51.315 -59.043,53.188 cw(c-56.503,53.188) -56.503,55.728 -26.879,55.728 ccw(c-26.879,61.9) -20.707,61.9 -20.707,68.762 cw(c-19.307,68.762) -20.297,69.752 -19.193,70.856 ccw(c-21.215,72.393) -18.675,72.393 -18.675,75.08 U301.22@-19.074,75.479 -19.316,75.721 ccw(c-19.859,75.178) -19.859,75.946 cw(c-19.859,76.714) -20.402,76.171 U301.22@-20.665,76.434
  Bottom Layer w0.254: S245.2@-49.518,32.265 -49.518,32.607 cw(c-46.978,32.607) -46.978,35.147 -40.006,35.147 ccw(c-40.006,37.79) -40.006,40.433 -56.503,40.433 cw(c-56.503,42.973) -59.043,42.973 S231.2@-59.043,51.315 -59.043,64.55 cw(c-56.503,64.55) -58.3,66.346 S217.2@-54.281,70.365 cw(c-51.853,70.365) -51.853,72.793 -40.006,72.793 ccw(c-40.006,75.89) -40.006,78.987 -42.216,78.987 cw(c-42.216,81.527) -44.756,81.527 S203.2@-44.756,89.415
col4: S204.2 S218.2 S232.2 S246.2 S260.2 U301.21 | length 292.6
  Component Side w0.254: S232.2@-78.093,51.315 -78.093,53.642 cw(c-75.553,53.642) -75.553,56.182 -26.879,56.182 ccw(c-26.879,61.9) -21.161,61.9 -21.161,68.762 cw(c-19.307,68.762) -20.618,70.073 -19.96,70.731 ccw(c-21.548,72.319) -19.303,72.319 -19.303,74.358 -19.364,74.358 -19.364,74.638 U301.21@-19.639,74.913 -19.851,74.913 U301.21@-21.018,76.08
  Bottom Layer w0.254: S260.2@-64.043,5.215 ccw(c-64.043,5.453) -63.805,5.453 S260.2@-63.805,13.215 -63.805,26.45 ccw(c-66.345,26.45) -64.549,28.246 S246.2@-68.568,32.265 -68.568,33.061 cw(c-66.028,33.061) -66.028,35.601 -40.006,35.601 ccw(c-40.006,37.79) -40.006,39.979 -75.553,39.979 cw(c-75.553,42.519) -78.093,42.519 S232.2@-78.093,51.315 -78.093,64.55 cw(c-75.553,64.55) -77.35,66.346 S218.2@-73.331,70.365 -73.331,70.707 cw(c-70.791,70.707) -70.791,73.247 -40.006,73.247 ccw(c-40.006,75.89) -40.006,78.533 -61.266,78.533 cw(c-61.266,81.073) -63.806,81.073 S204.2@-63.806,89.415
col5: S205.2 S219.2 S233.2 S247.2 S261.2 U301.20 | length 388
  Component Side w0.254: S233.2@-97.143,51.315 -97.143,54.096 cw(c-94.603,54.096) -94.603,56.636 -26.879,56.636 ccw(c-26.879,61.9) -21.615,61.9 -21.615,68.762 cw(c-19.307,68.762) -20.94,70.393 cw(c-19.307,68.762) -20.939,70.394 -20.4,70.933 ccw(c-22.358,72.551) -19.818,72.551 -19.818,73.961 U301.20@-20.205,74.348 -20.205,74.56 U301.20@-21.372,75.726
  Bottom Layer w0.254: S261.2@-104.287,13.215 -96.207,13.215 ccw(c-96.207,14.922) S261.2@-94.999,13.715 -94.999,24.079 cw(c-92.459,24.079) -94.256,25.875 S247.2@-87.618,32.512 ; S247.2@-87.618,32.265 S247.2@-87.618,32.512 ; S205.2@-82.856,89.415 -82.856,80.619 ccw(c-80.316,80.619) -80.316,78.079 -40.006,78.079 cw(c-40.006,75.89) -40.006,73.701 -89.841,73.701 ccw(c-89.841,71.161) -92.381,71.161 S219.2@-92.381,70.365 -96.4,66.346 ccw(c-94.603,64.55) -97.143,64.55 S233.2@-97.143,51.315 -97.143,42.065 ccw(c-94.603,42.065) -94.603,39.525 -40.006,39.525 cw(c-40.006,37.79) -40.006,36.055 -85.078,36.055 ccw(c-85.078,33.515) -87.618,33.515 S247.2@-87.618,32.512
col6: S206.2 S220.2 S234.2 S248.2 U301.19 | length 449.9
  Component Side w0.254: S234.2@-116.193,51.315 -116.193,54.55 cw(c-113.653,54.55) -113.653,57.09 -26.879,57.09 ccw(c-26.879,61.9) -22.069,61.9 -22.069,68.762 cw(c-19.307,68.762) -21.261,70.714 cw(c-19.307,68.762) -21.26,70.715 -21.088,70.887 ccw(c-22.667,72.466) -20.434,72.466 U301.19@-20.434,73.642 ; U301.19@-21.725,75.373 -21.253,74.901 cw(c-21.605,74.549) -21.108,74.549 ccw(c-20.069,74.549) -20.804,73.815 U301.19@-20.771,73.782
  Bottom Layer w0.254: S248.2@-106.668,32.265 -106.668,33.969 cw(c-104.128,33.969) -104.128,36.509 -40.006,36.509 ccw(c-40.006,37.79) -40.006,39.071 -113.653,39.071 cw(c-113.653,41.611) -116.193,41.611 S234.2@-116.193,51.315 -116.193,64.55 cw(c-113.653,64.55) -115.45,66.346 S220.2@-111.431,70.365 -111.431,71.615 cw(c-108.891,71.615) -108.891,74.155 -40.006,74.155 ccw(c-40.006,75.89) -40.006,77.625 -99.366,77.625 cw(c-99.366,80.165) -101.906,80.165 S206.2@-101.906,89.415
col7: S207.2 S221.2 S235.2 S249.2 U301.18 | length 530.9
  Component Side w0.254: S235.2@-135.243,51.315 -135.243,55.004 cw(c-132.703,55.004) -132.703,57.544 -26.879,57.544 ccw(c-26.879,61.9) -22.523,61.9 -22.523,68.762 cw(c-19.307,68.762) -21.582,71.035 cw(c-19.307,68.762) -21.581,71.036 ; -21.587,71.042 -21.357,71.273 ccw(c-22.221,72.136) -21,72.136 -21,72.599 -21.336,72.936 U301.18@-21.336,73.216 -21.768,73.648 -21.768,74.642 ; -21.768,74.642 ccw(c-23.871,73.227) U301.18@-22.079,75.019 -21.768,74.709 -21.768,74.642
  Bottom Layer w0.254: S249.2@-125.718,32.265 -125.718,33.969 ccw(c-128.258,33.969) -128.258,36.509 -214.006,36.509 cw(c-214.006,37.79) -214.006,39.071 -137.783,39.071 ccw(c-137.783,41.611) -135.243,41.611 S235.2@-135.243,51.315 -135.243,64.55 cw(c-132.703,64.55) -134.5,66.346 S221.2@-130.481,70.365 -130.481,72.069 cw(c-127.941,72.069) -127.941,74.609 -40.006,74.609 ccw(c-40.006,75.89) -40.006,77.171 -118.416,77.171 cw(c-118.416,79.711) -120.956,79.711 S207.2@-120.956,89.415
col8: S208.2 S222.2 S236.2 S250.2 S262.2 U301.17 | length 515.6
  Component Side w0.254: S236.2@-154.293,51.315 -154.293,55.458 cw(c-151.753,55.458) -151.753,57.998 -26.879,57.998 ccw(c-26.879,61.9) -22.977,61.9 -22.977,68.762 cw(c-19.307,68.762) -22.096,71.148 ccw(c-24.262,72.084) -21.902,72.084 U301.17@-21.902,72.651 ; U301.17@-22.432,74.666 -22.432,73.931 ccw(c-20.622,73.931) U301.17@-21.902,72.651
  Bottom Layer w0.254: S262.2@-145.045,14.295 -144.786,14.554 S250.2@-144.786,32.133 ; S262.2@-145.005,13.715 -145.005,13.279 ccw(c-142.465,13.279) -142.465,10.739 -130.885,10.739 ccw(c-130.885,13.215) S262.2@-128.409,13.215 ; S250.2@-144.768,32.265 -144.768,33.515 ccw(c-147.308,33.515) -147.308,36.055 -214.006,36.055 cw(c-214.006,37.79) -214.006,39.525 -156.833,39.525 ccw(c-156.833,42.065) -154.293,42.065 S236.2@-154.293,51.315 -154.293,64.55 cw(c-151.753,64.55) -153.55,66.346 S222.2@-149.531,70.365 -149.531,72.069 ccw(c-152.071,72.069) -152.071,74.609 -214.006,74.609 cw(c-214.006,75.89) -214.006,77.171 -142.546,77.171 ccw(c-142.546,79.711) -140.006,79.711 S208.2@-140.006,89.415
col9: S209.2 S223.2 S237.2 S251.2 S263.2 U301.16 | length 452.4
  Component Side w0.254: S237.2@-173.343,51.315 -173.343,55.912 cw(c-170.803,55.912) -170.803,58.452 -26.879,58.452 ccw(c-26.879,61.9) -23.431,61.9 -23.431,72.2 U301.16@-23.882,72.651 ; S263.2@-166.937,13.215 ccw(c-166.937,13.715) S263.2@-166.437,13.715 ; U301.16@-23.882,72.651 ccw(c-25.162,73.931) -23.352,73.931 U301.16@-23.352,74.666
  Bottom Layer w0.254: S263.2@-175.725,13.215 -166.937,13.215 ccw(c-166.937,13.715) S263.2@-166.437,13.715 -164.562,15.59 ccw(c-166.358,17.386) -163.818,17.386 S251.2@-163.818,32.265 -163.818,33.061 ccw(c-166.358,33.061) -166.358,35.601 -214.006,35.601 cw(c-214.006,37.79) -214.006,39.979 -175.883,39.979 ccw(c-175.883,42.519) -173.343,42.519 S237.2@-173.343,51.315 -173.343,64.55 cw(c-170.803,64.55) -172.6,66.346 S223.2@-168.581,70.365 S223.2@-168.581,71.615 ; -168.581,72.136 S223.2@-168.581,71.615 ; S251.2@-163.963,32.41 S251.2@-163.963,33.061 ; S209.2@-159.056,89.415 -159.056,80.165 cw(c-161.596,80.165) -161.596,77.625 -214.006,77.625 ccw(c-214.006,75.89) -214.006,74.155 -171.121,74.155 cw(c-171.121,71.615) S223.2@-168.581,71.615
col10: S210.2 S224.2 S238.2 S252.2 U301.15 | length 365.2
  Component Side w0.254: S238.2@-192.393,51.315 -192.393,56.366 cw(c-189.853,56.366) -189.853,58.906 -26.879,58.906 ccw(c-26.879,61.9) -23.885,61.9 -23.885,69.486 ccw(c-25.384,69.486) -24.323,70.545 -24.517,70.739 cw(c-23.871,71.385) -24.785,71.385 U301.15@-24.785,72.898 ; U301.15@-24.448,73.216 -24.391,73.273 ccw(c-25.296,74.178) -24.016,74.178 -24.016,74.709 U301.15@-23.705,75.019
  Bottom Layer w0.254: S252.2@-182.868,32.265 -182.868,32.607 ccw(c-185.408,32.607) -185.408,35.147 -214.006,35.147 cw(c-214.006,37.79) -214.006,40.433 -194.933,40.433 ccw(c-194.933,42.973) -192.393,42.973 S238.2@-192.393,51.315 -192.393,64.55 cw(c-189.853,64.55) -191.65,66.346 S224.2@-187.631,70.365 -187.631,71.161 ccw(c-190.171,71.161) -190.171,73.701 -214.006,73.701 cw(c-214.006,75.89) -214.006,78.079 -180.646,78.079 ccw(c-180.646,80.619) -178.106,80.619 S210.2@-178.106,89.415
col11: S211.2 S225.2 S239.2 S253.2 S268.1 U301.14 | length 333
  Component Side w0.254: S239.2@-216.443,51.815 -216.443,56.82 cw(c-213.903,56.82) -213.903,59.36 -26.879,59.36 ccw(c-26.879,61.9) -24.339,61.9 -24.339,69.298 ccw(c-25.838,69.298) -24.777,70.357 ; -24.971,70.551 -24.778,70.358 ; -24.972,70.551 cw(c-24.056,71.466) -25.35,71.466 -25.35,73.445 U301.14@-25.013,73.782 -24.644,74.151 -24.644,74.549 cw(c-24.068,74.549) -24.476,74.956 ; -24.475,74.956 U301.14@-24.059,75.373
  Bottom Layer w0.254: S268.1@-204.537,13.715 -204.537,28.594 cw(c-201.997,28.594) -203.794,30.39 S253.2@-201.918,32.265 -201.918,32.637 ccw(c-203.975,32.637) -203.975,34.693 -214.006,34.693 cw(c-214.006,37.79) -216.493,39.635 ccw(c-216.697,39.786) -216.443,39.787 S239.2@-216.443,51.815 -216.443,59.55 cw(c-213.903,59.55) -215.7,61.346 S225.2@-206.681,70.365 -206.681,70.707 ccw(c-209.221,70.707) -209.221,73.247 -214.006,73.247 cw(c-214.006,75.89) -214.006,78.533 -199.696,78.533 ccw(c-199.696,81.073) -197.156,81.073 S211.2@-197.156,89.415
col12: S212.2 S226.2 S240.2 S254.2 S265.2 U301.12 | length 320
  Component Side w0.254: S240.2@-230.493,51.315 -230.493,57.274 cw(c-227.953,57.274) -227.953,59.814 -35.947,59.814 ccw(c-35.947,65.532) -33.17,60.533 ccw(c-35.947,65.532) -30.948,62.755 ccw(c-35.947,65.532) -30.229,65.532 -30.229,71.245 cw(c-27.689,71.245) -29.485,73.041 -28.897,73.629 cw(c-27.692,72.424) -27.692,74.128 ccw(c-27.692,75.968) -26.391,74.667 U301.12@-26.145,74.913 -25.998,74.913 ccw(c-25.998,75.07) -25.887,74.959 U301.12@-24.766,76.08
  Bottom Layer w0.254: -223.587,5.215 -223.587,10.675 cw(c-221.047,10.675) -221.047,13.215 S265.2@-220.968,13.215 S254.2@-220.968,32.265 -229.75,41.046 cw(c-227.953,42.842) -230.493,42.842 S240.2@-230.493,51.315 -230.493,70.292 ccw(c-231.304,70.292) S226.2@-230.731,70.865 -216.95,84.646 ccw(c-218.746,86.442) -216.206,86.442 S212.2@-216.206,89.415
col13: S213.2 S241.2 U301.11 | length 286.7
  Component Side w0.254: S241.2@-254.518,51.815 -254.889,51.815 cw(c-254.889,54.355) -257.429,54.355 -257.429,57.728 cw(c-254.889,57.728) -254.889,60.268 -241.587,60.268 cw(c-241.586,60.014) -241.357,60.124 ccw(c-237.75,61.865) -234.143,60.124 cw(c-233.914,60.014) -233.913,60.268 -233.118,60.268 cw(c-233.118,58.728) v1(-232.029,59.817) cw(c-230.94,58.728) -230.94,60.268 -35.947,60.268 ccw(c-35.947,65.532) -33.445,60.9 ccw(c-35.947,65.532) -31.315,63.03 ccw(c-35.947,65.532) -30.683,65.532 -30.683,71.245 cw(c-27.689,71.245) -29.807,73.361 -28.862,74.306 cw(c-27.819,73.021) -27.819,74.676 ccw(c-27.819,75.414) -27.297,74.892 U301.11@-26.71,75.479 -26.243,75.946 -25.925,75.946 ccw(c-25.925,76.714) -25.382,76.171 U301.11@-25.119,76.434
  Bottom Layer w0.254: S213.2@-235.256,89.415 -235.256,62.357 ccw(c-232.716,62.357) -232.716,59.817 v1(-232.029,59.817)